# EAGLE board CT_schematic (EAGLE 7.6.0)

Size 100 x 80 mm. Coordinates in mm from the lower left corner, seen from the top.
Outline: 0,0 100,0 100,80 0,80 0,0
Copper layers (1*16): Top 0.035mm / dielectric 1.5mm / Bottom 0.035mm
Design rules "default": minimum track width 10mil, minimum drill 24mil, track to track 8mil, track to pad 8mil, pad to pad 8mil, via to via 8mil, smd to smd 8mil, copper to edge 40mil, drill to drill 8mil, minimum pad ring 10mil, minimum via ring 8mil, stop-mask expansion 4mil, vias tented up to drill 0mil, thermal gap 10mil

## Footprints (pad centres in the part's own frame; a part is rotated, then mirrored left to right if it is on the bottom)
C0603 = smd 0.8 x 0.8: 1 -0.762,0; 2 0.762,0
C0402 = smd 0.5 x 0.5: 1 -0.508,0; 2 0.508,0
EXV-9B = smd 2.718 x 1.778: 1 -2.108,0; 2 2.108,0
EXV-9H = smd 3.505 x 1.676: 1 -2.857,0; 2 2.857,0
L0603 = smd 0.8 x 0.8: 1 -0.762,0; 2 0.762,0
PJ-037B_PACKAGE = drill 3.7 square: 1 12,0 | drill 3.2 square: 2 6,0
R0603 = smd 0.8 x 0.8: 1 -0.762,0; 2 0.762,0
LQFP100 = smd 0.3 x 1.2: 1 -6,-7.75; 2 -5.5,-7.75; 3 -5,-7.75; 4 -4.5,-7.75; 5 -4,-7.75; 6 -3.5,-7.75; 7 -3,-7.75; 8 -2.5,-7.75; 9 -2,-7.75; 10 -1.5,-7.75; 11 -1,-7.75; 12 -0.5,-7.75; 13 0,-7.75; 14 0.5,-7.75; 15 1,-7.75; 16 1.5,-7.75; 17 2,-7.75; 18 2.5,-7.75; 19 3,-7.75; 20 3.5,-7.75; 21 4,-7.75; 22 4.5,-7.75; 23 5,-7.75; 24 5.5,-7.75; 25 6,-7.75; 51 6,7.75; 52 5.5,7.75; 53 5,7.75; 54 4.5,7.75; 55 4,7.75; 56 3.5,7.75; 57 3,7.75; 58 2.5,7.75; 59 2,7.75; 60 1.5,7.75; 61 1,7.75; 62 0.5,7.75; 63 0,7.75; 64 -0.5,7.75; 65 -1,7.75; 66 -1.5,7.75; 67 -2,7.75; 68 -2.5,7.75; 69 -3,7.75; 70 -3.5,7.75; 71 -4,7.75; 72 -4.5,7.75; 73 -5,7.75; 74 -5.5,7.75; 75 -6,7.75 | smd 1.2 x 0.3: 26 7.75,-6; 27 7.75,-5.5; 28 7.75,-5; 29 7.75,-4.5; 30 7.75,-4; 31 7.75,-3.5; 32 7.75,-3; 33 7.75,-2.5; 34 7.75,-2; 35 7.75,-1.5; 36 7.75,-1; 37 7.75,-0.5; 38 7.75,0; 39 7.75,0.5; 40 7.75,1; 41 7.75,1.5; 42 7.75,2; 43 7.75,2.5; 44 7.75,3; 45 7.75,3.5; 46 7.75,4; 47 7.75,4.5; 48 7.75,5; 49 7.75,5.5; 50 7.75,6; 76 -7.75,6; 77 -7.75,5.5; 78 -7.75,5; 79 -7.75,4.5; 80 -7.75,4; 81 -7.75,3.5; 82 -7.75,3; 83 -7.75,2.5; 84 -7.75,2; 85 -7.75,1.5; 86 -7.75,1; 87 -7.75,0.5; 88 -7.75,0; 89 -7.75,-0.5; 90 -7.75,-1; 91 -7.75,-1.5; 92 -7.75,-2; 93 -7.75,-2.5; 94 -7.75,-3; 95 -7.75,-3.5; 96 -7.75,-4; 97 -7.75,-4.5; 98 -7.75,-5; 99 -7.75,-5.5; 100 -7.75,-6
SOIC-8 = smd 1.6 x 0.6: 1 -2.7,1.905 | smd 1.55 x 0.6: 2 -2.7,0.635; 3 -2.7,-0.635; 4 -2.7,-1.905; 5 2.7,-1.905; 6 2.7,-0.635; 7 2.7,0.635; 8 2.7,1.905
ASEK = smd 1.4 x 1: 1 -1.1,-0.8; 2 1.1,-0.8; 3 1.1,0.8; 4 -1.1,0.8
ASFL1 = smd 1.7 x 1.5: 1 -1.27,-1.1; 2 1.27,-1.1; 3 1.27,1.1; 4 -1.27,1.1
LP2954 = smd 1.6 x 0.6: 1 -2.475,1.905 | smd 1.55 x 0.6: 2 -2.475,0.635; 3 -2.475,-0.635; 4 -2.475,-1.905; 5 2.475,-1.905; 6 2.475,-0.635; 7 2.475,0.635; 8 2.475,1.905
SON-6 = smd 0.55 x 0.3: 1 -0.355,0.5 | smd 0.52 x 0.3: 2 -0.37,0; 3 -0.37,-0.5; 4 0.37,-0.5; 5 0.37,0; 6 0.37,0.5
SW_4-1437565-2 = smd 1.4 x 2.1: 1 -2.23,4.55; 2 -2.23,-4.55; 3 2.23,4.55; 4 2.23,-4.55
LGM67K-G1J2-24-Z = smd 0.8 x 1.4: A -2,0; C 0,0
NC7SZ125M5X = smd 1.3 x 0.7: 1 -1.3,0.95; 2 -1.3,0; 3 -1.3,-0.95; 4 1.3,-0.95; 5 1.3,0.95
DUMMY_PACKAGE_110 = drill 0.3: 1 0,-1; 2 1.5,-1; 3 3,-1

## Placement (x,y rotation side)
C1  1e-07  [C0603]  -33.02,63.5 0 top  (outside the outline)
C2  1e-07  [C0603]  -36.83,63.5 0 top  (outside the outline)
C3  1e-07  [C0603]  -40.64,63.5 0 top  (outside the outline)
C4  1e-07  [C0603]  -44.45,63.5 0 top  (outside the outline)
C5  1e-07  [C0603]  -48.26,63.5 0 top  (outside the outline)
C6  4.7e-06  [C0603]  -29.21,63.5 0 top  (outside the outline)
C7  1e-07  [C0603]  -52.07,63.5 0 top  (outside the outline)
C8  1e-08  [C0603]  -55.88,63.5 0 top  (outside the outline)
C9  1e-06  [C0603]  -59.69,63.5 0 top  (outside the outline)
C10  1e-08  [C0402]  -30.48,68.58 0 top  (outside the outline)
C11  1e-08  [C0402]  -34.29,68.58 0 top  (outside the outline)
C12  1e-08  [C0402]  -38.1,68.58 0 top  (outside the outline)
C13  1e-08  [C0402]  -41.91,68.58 0 top  (outside the outline)
C14  1e-06  [EXV-9B]  -30.48,50.8 0 top  (outside the outline)
C15  2.2e-06  [EXV-9B]  -39.37,50.8 0 top  (outside the outline)
C16  1e-07  [C0402]  -45.72,68.58 0 top  (outside the outline)
C17  0.0001  [EXV-9H]  -38.1,44.45 0 top  (outside the outline)
C18  0.0001  [EXV-9H]  -49.53,44.45 0 top  (outside the outline)
C19  1e-08  [C0402]  -49.53,68.58 0 top  (outside the outline)
F1  240.0  [L0603]  -15.24,68.58 0 top  (outside the outline)
J1  PJ-037B  [PJ-037B_PACKAGE]  -48.26,7.62 0 top  (outside the outline)
R2  1000.0  [R0603]  -19.05,68.58 0 top  (outside the outline)
R4  4700.0  [R0603]  -22.86,68.58 0 top  (outside the outline)
R5  10000.0  [R0603]  -35.56,58.42 0 top  (outside the outline)
R6  10000.0  [R0603]  -40.64,58.42 0 top  (outside the outline)
R7  10000.0  [R0603]  -45.72,58.42 0 top  (outside the outline)
R8  10000.0  [R0603]  -50.8,58.42 0 top  (outside the outline)
R9  10000.0  [R0603]  -55.88,58.42 0 top  (outside the outline)
R10  10000.0  [R0603]  -60.96,58.42 0 top  (outside the outline)
R11  10000.0  [R0603]  -15.24,63.5 0 top  (outside the outline)
R12  100000.0  [R0603]  -59.69,50.8 0 top  (outside the outline)
R13  100000.0  [R0603]  -15.24,58.42 0 top  (outside the outline)
R14  164658.62  [R0603]  -54.61,50.8 0 top  (outside the outline)
R15  100000.0  [R0603]  -20.32,58.42 0 top  (outside the outline)
R16  10000.0  [R0603]  -20.32,63.5 0 top  (outside the outline)
R17  10000.0  [R0603]  -25.4,63.5 0 top  (outside the outline)
R18  9100.0  [R0603]  -26.67,68.58 0 top  (outside the outline)
R19  680000.0  [R0603]  -25.4,58.42 0 top  (outside the outline)
R20  120000.0  [R0603]  -30.48,58.42 0 top  (outside the outline)
U1  STM32L071VBT6  [LQFP100]  -24.13,8.89 0 top  (outside the outline)
U2  AT25040B-SSHL-T  [SOIC-8]  -24.13,35.56 0 top  (outside the outline)
U3  AT25M02-SSHD-T  [SOIC-8]  -40.64,35.56 0 top  (outside the outline)
U4  ASEK-32.768KHz-ECST  [ASEK]  -29.21,44.45 0 top  (outside the outline)
U5  ASFL1-25MHZ-NCS  [ASFL1]  -58.42,34.29 0 top  (outside the outline)
U6  LP2954AIMX/NOPB  [LP2954]  -44.45,22.86 0 top  (outside the outline)
U7  TPS3895ADRYR  [SON-6]  -58.42,67.31 0 top  (outside the outline)
U8  4-1437565-2  [SW_4-1437565-2]  -27.94,24.13 0 top  (outside the outline)
U9  Q65110A2395  [LGM67K-G1J2-24-Z]  -17.78,52.07 0 top  (outside the outline)
U10  nc7sz125m5x  [NC7SZ125M5X]  -46.99,50.8 0 top  (outside the outline)
U11  Dummy  [DUMMY_PACKAGE_110]  -55.88,68.58 0 top  (outside the outline)

## Library data of the parts
C1-C19 F1 J1 R2 R4-R20 U1-U11 = circuit_tree

## Nets
CLK_U1_8: U1.8 U4.3
CLK_U1_12: U1.12 U5.3
GND: C1.2 C2.2 C3.2 C4.2 C5.2 C6.2 C7.2 C8.2 C9.2 C10.2 C11.2 C12.2 C13.2 C14.2 C15.2 C16.2 C17.2 C18.2 C19.2 J1.2 R2.2 R5.2 R15.2 R18.2 R20.2 U1.19 U1.20 U1.27 U1.49 U1.74 U1.99 U2.4 U3.4 U4.2 U5.2 U6.4 U7.2 U9.C U10.1 U10.3 U11.1
NET_U1_14: R4.1 U1.14 U10.4
NET_U1_22: C8.1 C9.1 F1.1 U1.21 U1.22
NET_U1_94: R5.1 U1.94
NET_U1_97: U9.A
NET_U1_98: U8.3 U8.4
NET_U2_3: R6.1 U2.3
NET_U2_7: R8.1 U2.7
NET_U3_3: R9.1 U3.3
NET_U3_7: R11.1 U3.7
NET_U6_3: R13.1 U6.3
NET_U6_5: R12.1 U6.5
NET_U6_7: R14.2 R15.1 U6.7
NET_U7_1: R17.1 R18.1 U7.1
NET_U7_3: R19.2 R20.1 U7.3
NET_U7_4: R16.1 U7.4 U10.2
NET_U8_1: R2.1 U8.1 U8.2
PROC_SPI1_MISO: U1.31 U3.2
PROC_SPI1_MOSI: U1.32 U3.5
PROC_SPI1_NSS: R10.1 U1.29 U3.1
PROC_SPI1_SCK: U1.30 U3.6
PROC_SPI2_MISO: U1.17 U2.2
PROC_SPI2_MOSI: U1.18 U2.5
PROC_SPI2_NSS: R7.1 U1.51 U2.1
PROC_SPI2_SCK: U1.47 U2.6
PROC_TIM2_CH1: U1.23 U11.3
PROC_TIM2_CH3: U1.25 U11.2
VCC_S1_10V2: C14.1 C17.1 C18.1 J1.1 R13.2 U6.8
VCC_TIER1_3V3: C1.1 C2.1 C3.1 C4.1 C5.1 C6.1 C7.1 C10.1 C11.1 C12.1 C13.1 C15.1 C16.1 C19.1 F1.2 R4.2 R6.2 R7.2 R8.2 R9.2 R10.2 R11.2 R12.2 R14.1 R16.2 R17.2 R19.1 U1.6 U1.28 U1.50 U1.73 U1.75 U1.100 U2.8 U3.8 U4.4 U5.4 U6.1 U7.6 U10.5

## Tracks (layer width: path | path; a pad name or v marks a point on that pad's centre or on a via)
CLK_U1_8  (1 unrouted)
CLK_U1_12  (1 unrouted)
GND  (40 unrouted)
NET_U1_14  (2 unrouted)
NET_U1_22  (4 unrouted)
NET_U1_94  (1 unrouted)
NET_U1_98  (1 unrouted)
NET_U2_3  (1 unrouted)
NET_U2_7  (1 unrouted)
NET_U3_3  (1 unrouted)
NET_U3_7  (1 unrouted)
NET_U6_3  (1 unrouted)
NET_U6_5  (1 unrouted)
NET_U6_7  (2 unrouted)
NET_U7_1  (2 unrouted)
NET_U7_3  (2 unrouted)
NET_U7_4  (2 unrouted)
NET_U8_1  (2 unrouted)
PROC_SPI1_MISO  (1 unrouted)
PROC_SPI1_MOSI  (1 unrouted)
PROC_SPI1_NSS  (2 unrouted)
PROC_SPI1_SCK  (1 unrouted)
PROC_SPI2_MISO  (1 unrouted)
PROC_SPI2_MOSI  (1 unrouted)
PROC_SPI2_NSS  (2 unrouted)
PROC_SPI2_SCK  (1 unrouted)
PROC_TIM2_CH1  (1 unrouted)
PROC_TIM2_CH3  (1 unrouted)
VCC_S1_10V2  (5 unrouted)
VCC_TIER1_3V3  (39 unrouted)